# Altium PCB PneumatikaDriverPCB.PcbDoc
Units mm, origin at the board's own origin, x right, y up, seen from the top; angles counter-clockwise.
Board outline 60.32 x 81.91 mm, 2 copper layers (Top Layer, Bottom Layer); 33 components, 32 nets, 102 pads, 10 vias.
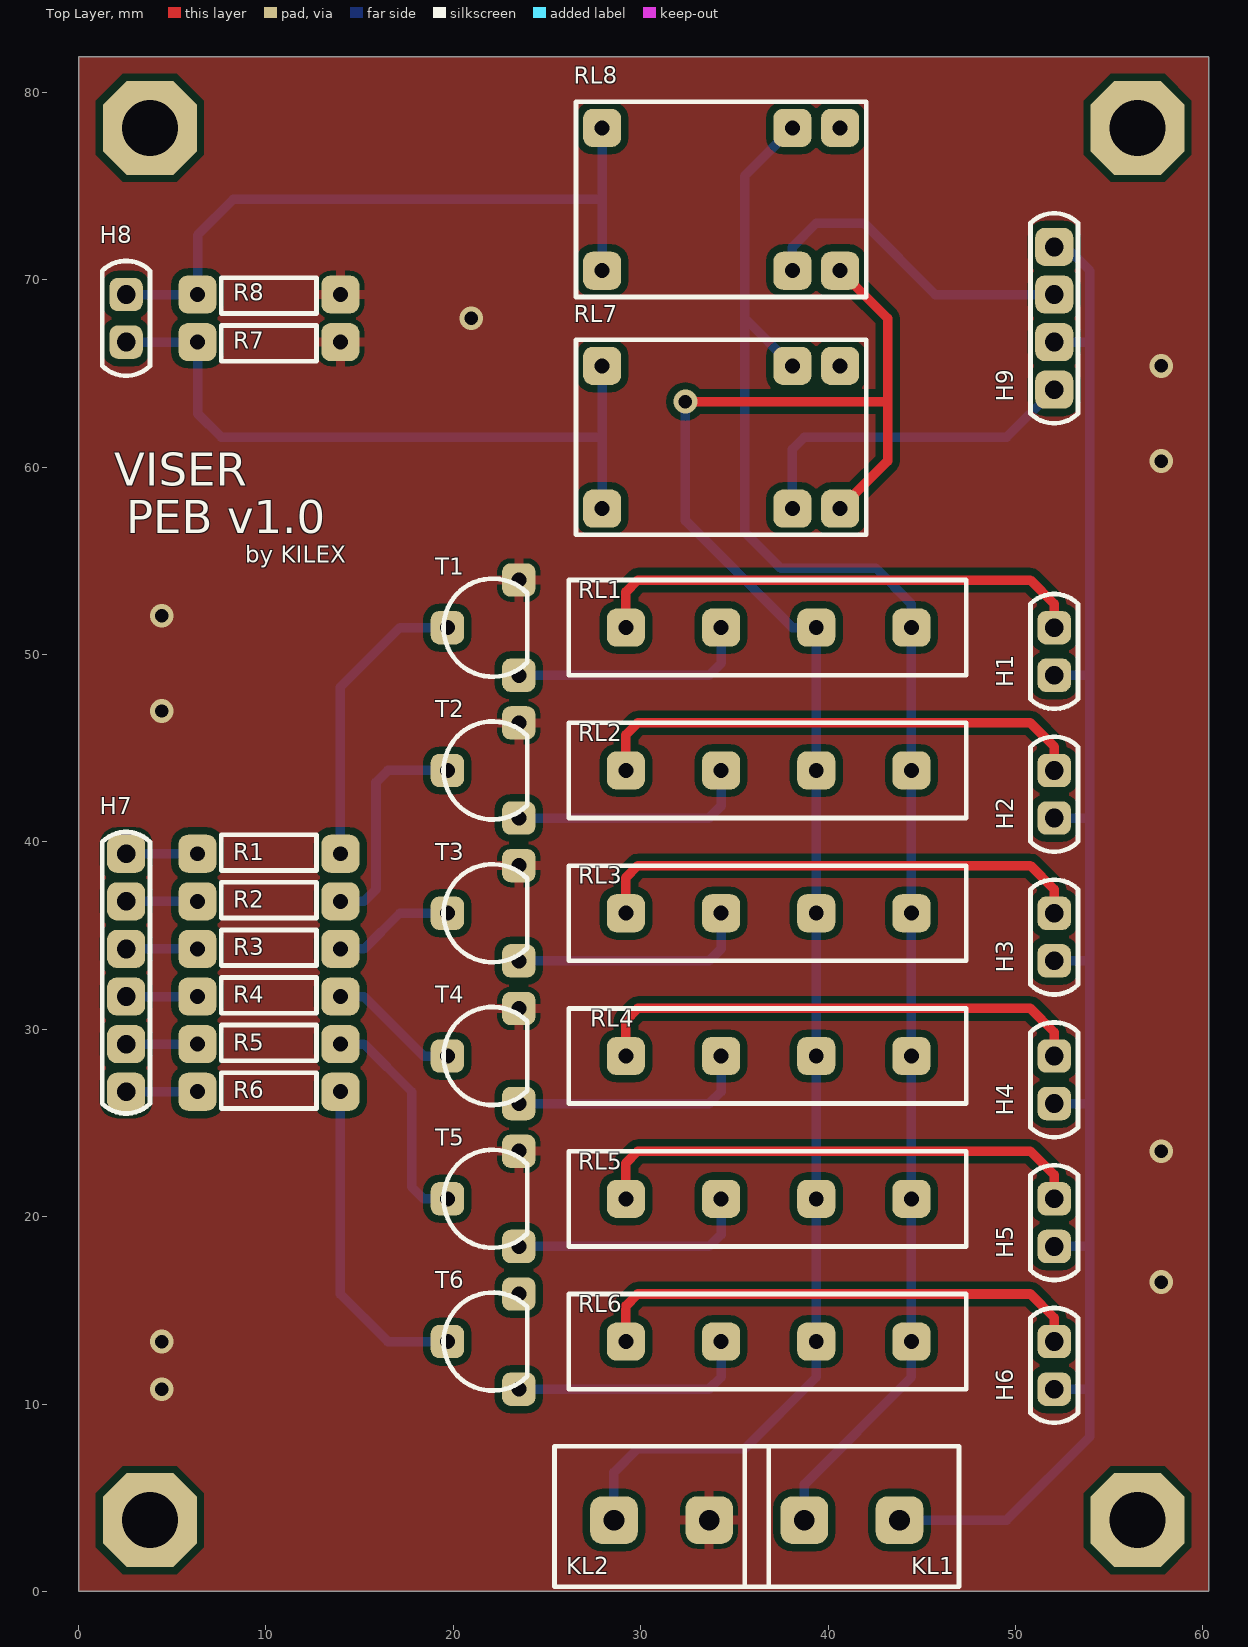
[diagram p0: Top Layer view]
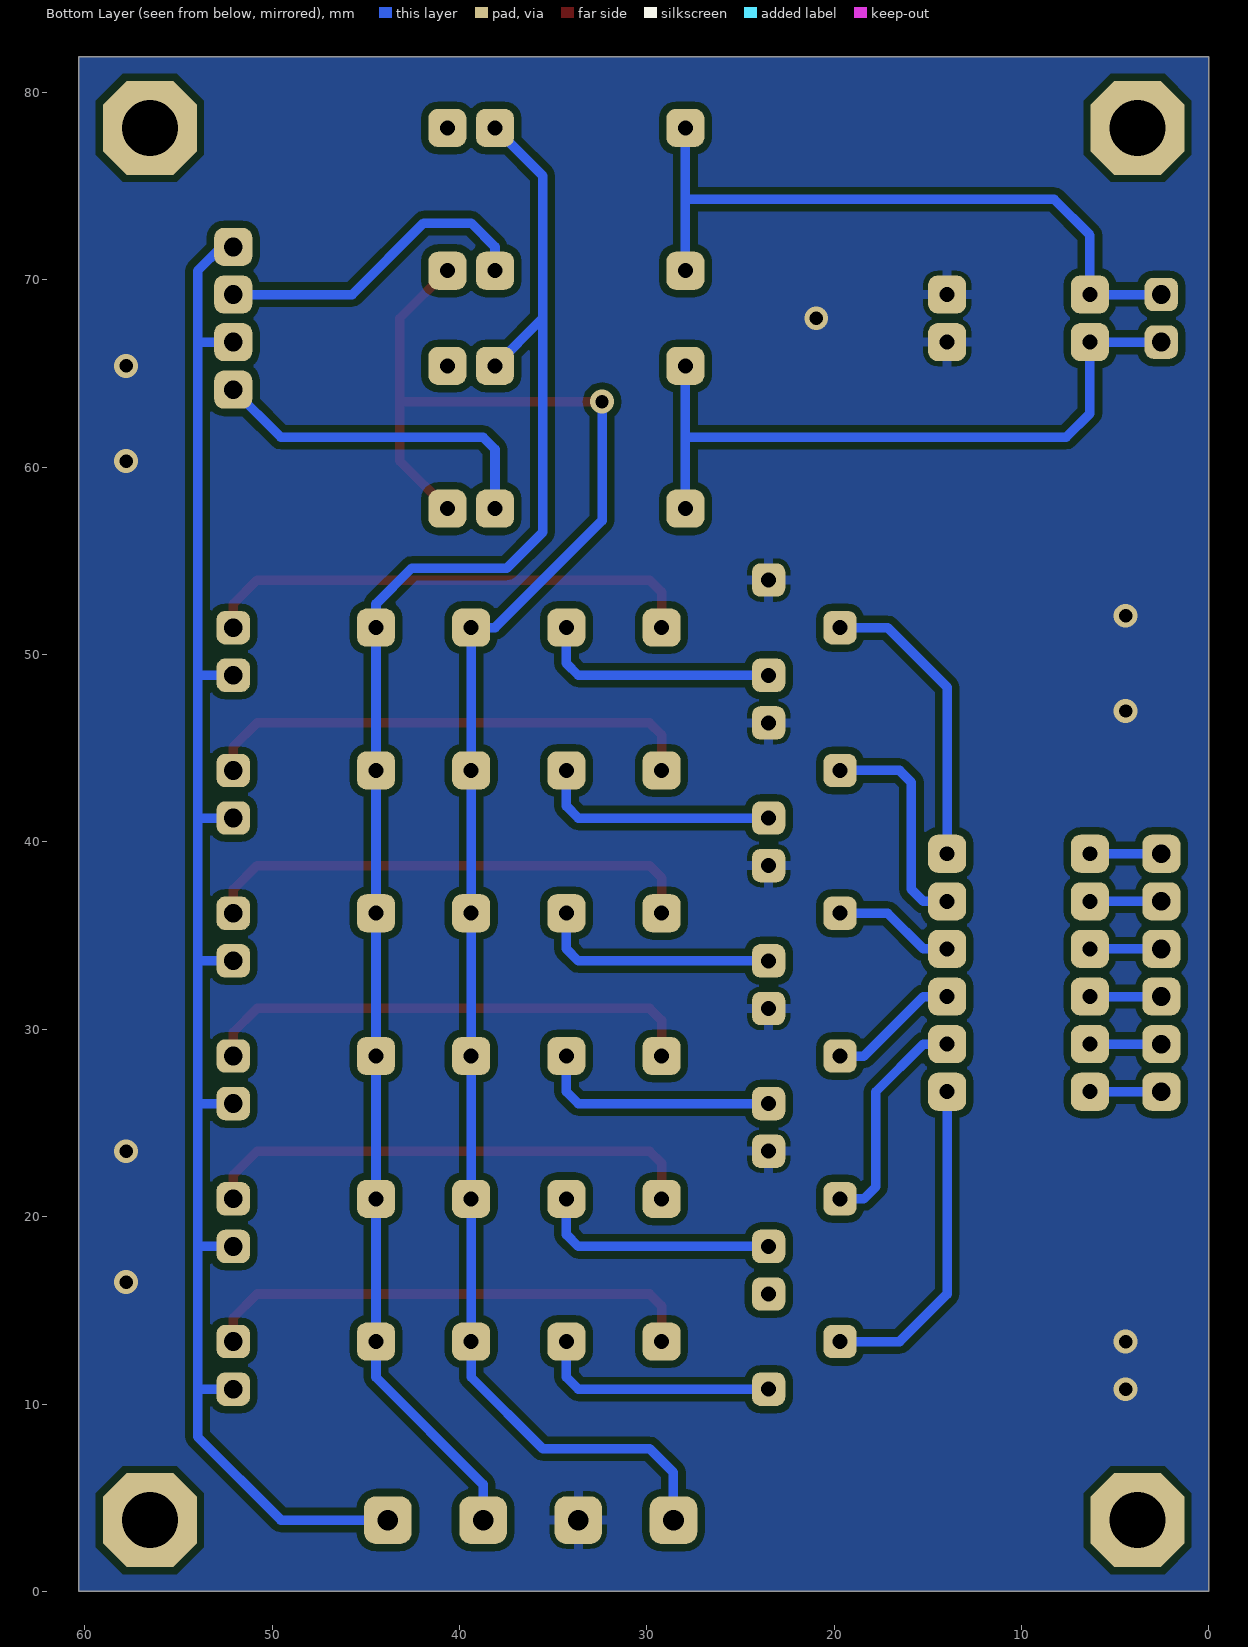
[diagram p1: Bottom Layer view, seen from below]
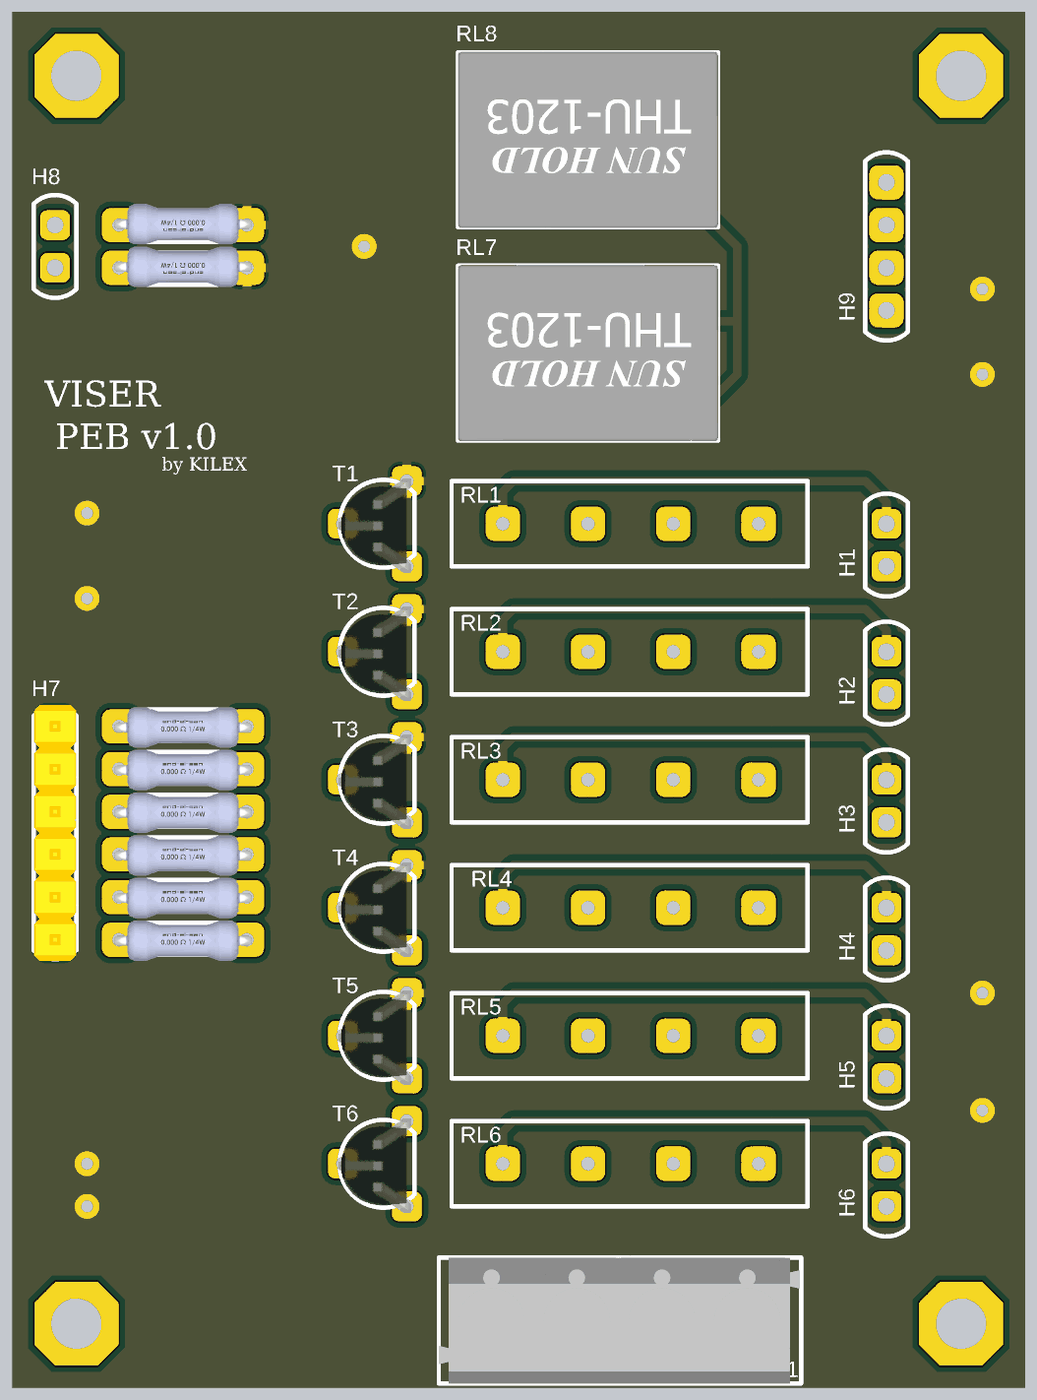
[diagram p2: 3D render of the assembled board from above, using the file's embedded part models]

## Layer stack, top to bottom
Top Solder: solder mask 0.0102, Solder Resist, Dk 3.5
Top Layer: signal copper 0.0356
Dielectric 1: dielectric 0.32, FR-4, Dk 4.8
Bottom Layer: signal copper 0.0356
Bottom Solder: solder mask 0.0102, Solder Resist, Dk 3.5

## Board outline
0,0 60.325,0 60.325,81.915 0,81.915

## Design rules (kind name [scope] priority, off if disabled: settings)
Clearance [All] p1: gap=0.381
PolygonConnect [All] p1: connectstyle=Relief reliefconductorwidth=0.508 reliefentries=4 polygonreliefangle="90 Angle" airgapwidth=0.254
RoutingVias [All] p1: holewidth=0.711 width=1.27 viastyle="Through Hole" minholewidth=0.711 minwidth=1.27 maxholewidth=0.711 maxwidth=1.27
SolderMaskExpansion [All] p1: expansion=0.102
Width [All] p1: maxlimit=0.762 minlimit=0.254 preferedwidth=0.508 minimp=50.000000 maximp=50.000000 favimp=50.000000
30 further rules are at their usual default settings.

## Components (designator, comment, footprint, x,y, rotation, side; value= is the part's Value field where it differs from the comment)
H1 "Header1x2" Header1x2 52.07,48.895 r90 top
H2 "Header1x2" Header1x2 52.07,41.275 r90 top
H3 "Header1x2" Header1x2 52.07,33.655 r90 top
H4 "Header1x2" Header1x2 52.07,26.035 r90 top
H5 "Header1x2" Header1x2 52.07,18.415 r90 top
H6 "Header1x2" Header1x2 52.07,10.795 r90 top
H7 "Header1x6" Header1x6 2.54,39.37 r270 top
H8 "Header1x2" Header1x2 2.54,66.675 r90 top
H9 "Header1x4" Header1x4 52.07,71.755 r270 top
KL1 "Klema" Klema 43.815,3.81 r180 top
KL2 "Klema" Klema 33.655,3.81 r180 top
R1 "1k" R1(300milsa) 6.35,39.37 r0 top
R2 "1k" R1(300milsa) 6.35,36.83 r0 top
R3 "1k" R1(300milsa) 6.35,34.29 r0 top
R4 "1k" R1(300milsa) 6.35,31.75 r0 top
R5 "1k" R1(300milsa) 6.35,29.21 r0 top
R6 "1k" R1(300milsa) 6.35,26.67 r0 top
R7 "1k" R1(300milsa) 13.97,66.675 r180 top
R8 "1k" R1(300milsa) 13.97,69.215 r180 top
RL1 "Rele" Rele(MD-5) 29.21,51.435 r0 top
RL2 "Rele" Rele(MD-5) 29.21,43.815 r0 top
RL3 "Rele" Rele(MD-5) 29.21,36.195 r0 top
RL4 "Rele" Rele(MD-5) 29.21,28.575 r0 top
RL5 "Rele" Rele(MD-5) 29.21,20.955 r0 top
RL6 "Rele" Rele(MD-5) 29.21,13.335 r0 top
RL7 "Rele2" "Rele(thu 24-03)" 40.64,65.405 r180 top
RL8 "Rele2" "Rele(thu 24-03)" 40.64,78.105 r180 top
T1 "BC567" TO-92 23.495,48.895 r90 top
T2 "BC567" TO-92 23.495,41.275 r90 top
T3 "BC567" TO-92 23.495,33.655 r90 top
T4 "BC567" TO-92 23.495,26.035 r90 top
T5 "BC567" TO-92 23.495,18.415 r90 top
T6 "BC567" TO-92 23.495,10.795 r90 top

## Footprints (in the part's own frame and the unit in brackets; to place one, negate y for a bottom-side part, rotate by r counter-clockwise, add the part's x,y. Pads: shape width x height; smd on the part's side, far side on the other; paste and mask are expansions set on the pad)
Header1x2 [mil]
  rrect50% 70x70 hole 39.37: 1(0,0) 2(100,0)
  silkscreen extent -71,-50 171,50
Header1x4 [mil]
  rrect50% 80x80 hole 39.37: 1(0,0) 2(100,0) 3(200,0) 4(300,0)
  silkscreen extent -71,-50 371,50
Header1x6 [mil]
  rrect50% 80x80 hole 39.37: 1(0,0) 2(100,0) 3(200,0) 4(300,0) 5(400,0) 6(500,0)
  silkscreen extent -46,-50 546,50, body extent -50,-50 550,50, height 374
Klema [mm]
  rrect50% 2.54x2.54 hole 1.1: 1(0,0) 2(5.08,0)
  silkscreen extent -3.18,-3.94 8.25,3.56, body extent -3.11,-3.94 8.25,3.56, height 9.95
R1(300milsa) [mil]
  rrect50% 80x80 hole 31.5: 1(0,0) 2(300,0)
  silkscreen extent 50,-35 250,40, body extent -12,-49 312,45, height 95
Rele(MD-5) [mil]
  rrect50% 80x80 hole 31.5: 1(200,0) 2(400,0) 3(0,0) 4(600,0)
  silkscreen extent -120,-100 715,100, body extent -120,-100 715,100, height 315
"Rele(thu 24-03)" [mil]
  rrect50% 80x80 hole 31.5: 1(500,0) 2(500,300) 3(100,0) 4(100,300) 5(0,300) 6(0,0)
  silkscreen extent -55,-55 555,355, body extent -55,-57 555,357, height 472
TO-92 [mil]
  rrect50% 70x70 hole 31.5: 1(100,150) 2(200,0) 3(0,0)
  silkscreen extent -3,-18 203,158, body extent -15,-9 205,159, height 385

## Part data
R1 R2 R3 R4 R5 R6 R7 R8: library part R1
T1 T2 T3 T4 T5 T6: library part "Transistor NPN"

## Free pads (board coordinates)
  oct 5x5 hole 3: 0(3.81,3.81) 0(3.81,78.105) 0(56.515,3.81) 0(56.515,78.105)

## Via types
v1: diameter 1.27, hole 0.711, Top Layer to Bottom Layer, 10 vias

## Nets (pads, with @x,y where several pads share a name; then routed paths per layer and width w, separated by ;. In a path a pad name is that pad's centre, name@x,y a point inside that pad or via, vN(x,y) a via of type N, cw(c..) or ccw(c..) an arc to the next point about the centre after c; other vN are vias at no path point)
+5V: KL2.2 RL1.2 RL2.2 RL3.2 RL4.2 RL5.2 RL6.2 RL7.5 RL8.5 | length 96.7
  Top Layer w0.508: v1(32.385,63.5) 43.18,63.5 ; RL7.5 43.18,60.325 43.18,63.5 ; RL8.5 43.18,67.945 43.18,63.5
  Bottom Layer w0.508: KL2.2 28.575,6.35 29.845,7.62 35.56,7.62 39.37,11.43 RL6.2 RL5.2 RL4.2 RL3.2 RL2.2 RL1.2 38.1,51.435 32.385,57.15 v1(32.385,63.5)
+24V: KL1.2 RL1.4 RL2.4 RL3.4 RL4.4 RL5.4 RL6.4 RL7.3 RL8.3 | length 88
  Bottom Layer w0.508: RL7.3 35.56,67.945 ; RL8.3 35.56,75.565 35.56,67.945 ; KL1.2 38.735,5.715 44.45,11.43 RL6.4 RL5.4 RL4.4 RL3.4 RL2.4 RL1.4 44.45,52.705 42.545,54.61 37.465,54.61 35.56,56.515 35.56,67.945
GND: KL2.1 R7.1 R8.1 T1.2 T2.2 T3.2 T4.2 T5.2
  other v1: 4.445,10.795 4.445,13.335 57.785,16.51 57.785,23.495 4.445,46.99 4.445,52.07 57.785,60.325 57.785,65.405 20.955,67.945
GND1: H1.1 H2.1 H3.1 H4.1 H5.1 H6.1 H9.1 H9.3 KL1.1 | length 90
  Bottom Layer w0.508: KL1.1 49.53,3.81 53.975,8.255 53.975,10.795 ; H6.1 53.975,10.795 ; H5.1 53.975,18.415 ; H4.1 53.975,26.035 ; H3.1 53.975,33.655 ; H2.1 53.975,41.275 ; H1.1 53.975,48.895 ; H9.3 53.975,66.675 ; H9.1 52.705,71.755 53.975,70.485 53.975,66.675 ; 53.975,10.795 53.975,18.415 ; 53.975,18.415 53.975,26.035 ; 53.975,26.035 53.975,33.655 ; 53.975,33.655 53.975,41.275 ; 53.975,41.275 53.975,48.895 ; 53.975,48.895 53.975,66.675
NetH1_2: H1.2 RL1.3 | length 26.8
  Top Layer w0.508: RL1.3 29.21,53.34 29.845,53.975 50.8,53.975 52.07,52.705 H1.2
NetH2_2: H2.2 RL2.3 | length 26.8
  Top Layer w0.508: RL2.3 29.21,45.72 29.845,46.355 50.8,46.355 52.07,45.085 H2.2
NetH3_2: H3.2 RL3.3 | length 26.8
  Top Layer w0.508: RL3.3 29.21,38.1 29.845,38.735 50.8,38.735 52.07,37.465 H3.2
NetH4_2: H4.2 RL4.3 | length 26.8
  Top Layer w0.508: RL4.3 29.21,30.48 29.845,31.115 50.8,31.115 52.07,29.845 H4.2
NetH5_2: H5.2 RL5.3 | length 26.8
  Top Layer w0.508: RL5.3 29.21,22.86 29.845,23.495 50.8,23.495 52.07,22.225 H5.2
NetH6_2: H6.2 RL6.3 | length 26.8
  Top Layer w0.508: RL6.3 29.21,15.24 29.845,15.875 50.8,15.875 52.07,14.605 H6.2
NetH7_1: H7.1 R1.1 | length 3.8
  Bottom Layer w0.508: H7.1 R1.1
NetH7_2: H7.2 R2.1 | length 3.8
  Bottom Layer w0.508: H7.2 R2.1
NetH7_3: H7.3 R3.1 | length 3.8
  Bottom Layer w0.508: H7.3 R3.1
NetH7_4: H7.4 R4.1 | length 3.8
  Bottom Layer w0.508: H7.4 R4.1
NetH7_5: H7.5 R5.1 | length 3.8
  Bottom Layer w0.508: H7.5 R5.1
NetH7_6: H7.6 R6.1 | length 3.8
  Bottom Layer w0.508: H7.6 R6.1
NetH8_1: H8.1 R7.2 RL7.1 RL7.2 | length 37.4
  Bottom Layer w0.508: H8.1 R7.2 6.35,62.865 7.62,61.595 27.94,61.595 ; RL7.2 27.94,61.595 ; RL7.1 27.94,61.595
NetH8_2: H8.2 R8.2 RL8.1 RL8.2 | length 37
  Bottom Layer w0.508: H8.2 R8.2 6.35,72.39 8.255,74.295 27.94,74.295 ; RL8.2 27.94,74.295 ; RL8.1 27.94,74.295
NetH9_2: H9.2 RL8.4 | length 17.3
  Bottom Layer w0.508: RL8.4 38.1,71.755 39.37,73.025 41.91,73.025 45.72,69.215 H9.2
NetH9_4: H9.4 RL7.4 | length 18.5
  Bottom Layer w0.508: RL7.4 38.1,60.96 38.735,61.595 49.53,61.595 H9.4
NetR1_2: R1.2 T1.1 | length 15.9
  Bottom Layer w0.508: R1.2 13.97,48.26 17.145,51.435 T1.1
NetR2_2: R2.2 T2.1 | length 12
  Bottom Layer w0.508: R2.2 15.24,36.83 15.875,37.465 15.875,43.18 16.51,43.815 T2.1
NetR3_2: R3.2 T3.1 | length 6.5
  Bottom Layer w0.508: R3.2 15.24,34.29 17.145,36.195 T3.1
NetR4_2: R4.2 T4.1 | length 7
  Bottom Layer w0.508: R4.2 15.24,31.75 18.415,28.575 T4.1
NetR5_2: R5.2 T5.1 | length 12.1
  Bottom Layer w0.508: R5.2 15.24,29.21 17.78,26.67 17.78,21.59 18.415,20.955 T5.1
NetR6_2: R6.2 T6.1 | length 17.6
  Bottom Layer w0.508: R6.2 13.97,15.875 16.51,13.335 T6.1
NetRL1_1: RL1.1 T1.3 | length 13
  Bottom Layer w0.508: T1.3 33.655,48.895 34.29,49.53 RL1.1
NetRL2_1: RL2.1 T2.3 | length 13
  Bottom Layer w0.508: T2.3 33.655,41.275 34.29,41.91 RL2.1
NetRL3_1: RL3.1 T3.3 | length 13
  Bottom Layer w0.508: T3.3 33.655,33.655 34.29,34.29 RL3.1
NetRL4_1: RL4.1 T4.3 | length 13
  Bottom Layer w0.508: T4.3 33.655,26.035 34.29,26.67 RL4.1
NetRL5_1: RL5.1 T5.3 | length 13
  Bottom Layer w0.508: T5.3 33.655,18.415 34.29,19.05 RL5.1
NetRL6_1: RL6.1 T6.3 | length 13
  Bottom Layer w0.508: T6.3 33.655,10.795 34.29,11.43 RL6.1
pads on no net: RL7.6 RL8.6 T6.2

## Polygon pours and split planes (outlines as drawn)
GND on Bottom Layer "GND" (solid, pour order 0): 0,0 60.325,0 60.325,81.915 0,81.915
GND on Top Layer "GND" (solid, pour order 2): 60.325,81.915 60.325,0 0,0 0,81.915

## Silkscreen, mask and mechanical layers (free items; w line width, h text height)
Top Overlay:
  text "VISER" at 1.905,58.42 h3
  text "PEB v1.0" at 2.54,55.88 h3
  text "by KILEX" at 8.89,54.61 h1.52
Mechanical 1:
  the board outline again, w0.254